# EAGLE board avoccado-avr-gin-panel (EAGLE 7.2.0)
Avoccado PCB AVR
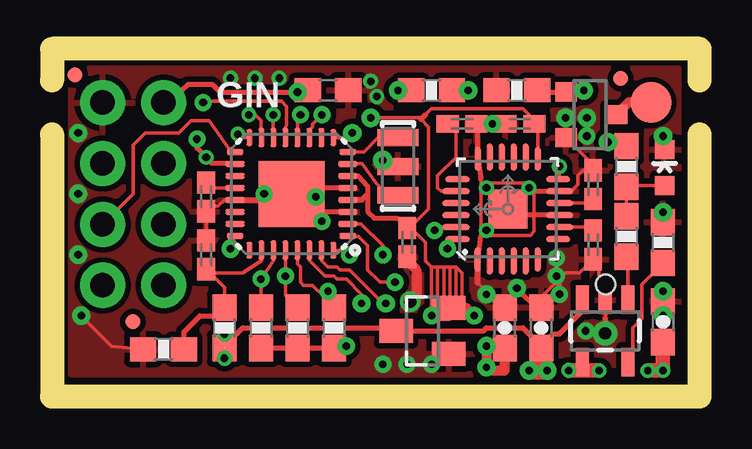
[diagram p0: board, top side]
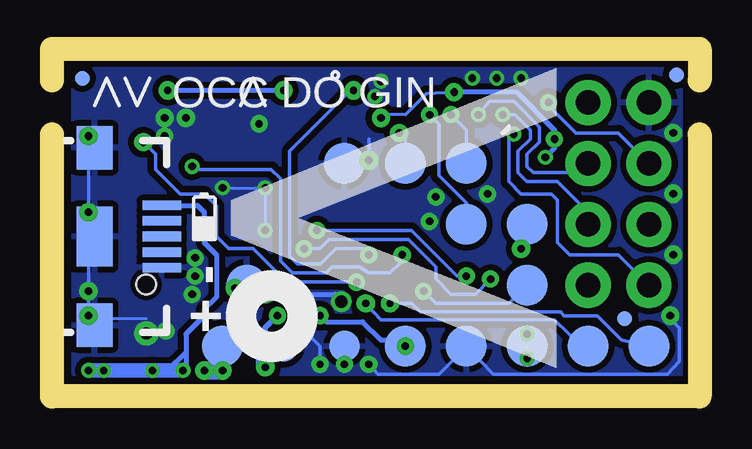
[diagram p1: board, bottom side, seen from below]

No outline drawn. Coordinates in mm, seen from the top.
Copper layers (1*16): Top 0.035mm / dielectric 1.5mm / Bottom 0.035mm
Design rules "SeeedStudio_2layer_DRU_no_angle_20140221 *": minimum track width 6mil, minimum drill 12mil, track to track 6mil, track to pad 6mil, pad to pad 6mil, via to via 6mil, smd to smd 0mil, copper to edge 10mil, drill to drill 10mil, minimum pad ring 10mil, minimum via ring 6mil, stop-mask expansion 0mil, vias tented up to drill 100mil, thermal gap 10mil
Net classes: 1 vcc: width 0.152 mm; 3 usbvcc: width 0.152 mm, drill 0.61 mm, clearance 0.152 mm
tRestrict: area 7.5,5.9 to 11.5,10; area 16.6,5.4 to 20.4,9.2
Milling: 6 lines

## Footprints (pad centres in the part's own frame; a part is rotated, then mirrored left to right if it is on the bottom)
C0402K = smd 0.925 x 0.74: 1 -0.6,0; 2 0.6,0
0603-CAP = smd 1.1 x 1: 1 -0.85,0; 2 0.85,0
C0603 = smd 1.1 x 1: 1 -0.85,0; 2 0.85,0
LED-0603 = smd 0.8 x 0.8: A 0,-0.75; C 0,0.75
MICRO-FIDUCIAL = smd 0.635 x 0.635: 1 0,0
1X02_NO_SILK = drill 1.016 pad 1.88: 1 0,0; 2 2.54,0
USB-B-MICRO-SMD_V03 = smd 1.6 x 0.4: D+1 2.8,0; D-1 2.8,0.65; GND1 2.8,-1.3; ID1 2.8,-0.65; VBUS1 2.8,1.3 | smd 1.5 x 1.8: SHIELD1 0,3.7; SHIELD2 0,-3.7 | smd 1.5 x 2.5: SHIELD3 0,0 | hole 0.8: 2.15,-2
SOT23 = smd 1 x 1.4: 1 -0.95,-1.1; 2 0.95,-1.1; 3 0,1.1
RESONATOR-SMD = smd 0.7 x 1.7: 1 -1.2,0; 2 0,0; 3 1.2,0
SOT23-3 = smd 0.8 x 0.9: 1 -0.95,-1; 2 0.95,-1; 3 0,1.1
0603-RES = smd 1.1 x 1: 1 -0.85,0; 2 0.85,0
TP20R = smd 1.7 x 1.7: TP 0,0
PAD.03X.05 = smd 1.27 x 1.27: P$1 0,0
QFN-24-TESTING = smd 1.016 x 0.254: 1 -2.1,1.257; 6 -2.1,-1.25; 13 2.1,-1.25; 18 2.1,1.25 | smd 1.143 x 0.254: 2 -2.163,0.75; 3 -2.163,0.25; 4 -2.163,-0.25; 5 -2.163,-0.75; 14 2.163,-0.75; 15 2.163,-0.25; 16 2.163,0.25; 17 2.163,0.75 | smd 0.254 x 1.016: 7 -1.25,-2.1; 12 1.25,-2.1; 19 1.25,2.1; 24 -1.25,2.1 | smd 0.254 x 1.143: 8 -0.75,-2.163; 9 -0.25,-2.163; 10 0.25,-2.163; 11 0.75,-2.163; 20 0.75,2.163; 21 0.25,2.163; 22 -0.25,2.163; 23 -0.75,2.163 | smd 1.626 x 1.626: P$1 0,0
SOT23-5 = smd 0.55 x 1.2: 1 -0.95,-1.3; 2 0,-1.3; 3 0.95,-1.3; 4 0.95,1.3; 5 -0.95,1.3
MLF32-PAD = smd 0.7 x 0.25: 1 -2.35,1.75; 8 -2.35,-1.75; 17 2.35,-1.75; 24 2.35,1.75 | smd 0.8 x 0.25: 2 -2.35,1.25; 3 -2.35,0.75; 4 -2.35,0.25; 5 -2.35,-0.25; 6 -2.35,-0.75; 7 -2.35,-1.25; 18 2.35,-1.25; 19 2.35,-0.75; 20 2.35,-0.25; 21 2.35,0.25; 22 2.35,0.75; 23 2.35,1.25 | smd 0.25 x 0.7: 9 -1.75,-2.35; 16 1.75,-2.35; 25 1.75,2.35; 32 -1.75,2.35 | smd 0.25 x 0.8: 10 -1.25,-2.35; 11 -0.75,-2.35; 12 -0.25,-2.35; 13 0.25,-2.35; 14 0.75,-2.35; 15 1.25,-2.35; 26 1.25,2.35; 27 0.75,2.35; 28 0.25,2.35; 29 -0.25,2.35; 30 -0.75,2.35; 31 -1.25,2.35 | smd 2.75 x 2.75: PAD 0,0

## Placement (x,y rotation side)
C1  0.1uF  [C0402K]  5.94,7.85 90 top
C2  0.1uF  [C0402K]  19.02,10.9 0 top
C3  0.1uF  [C0402K]  14.33,5.95 90 top
C4  4.7uF  [0603-CAP]  24.99,2.64 90 top
C5  4.7uF  [0603-CAP]  19.91,2.39 90 top
C6  4.7uF  [0603-CAP]  18.39,2.39 90 top
C7  0.1uF  [C0402K]  5.94,5.44 90 top
C8  0.1uF  [C0402K]  22.07,8.36 90 top
C9  2.2nF  [C0402K]  16.61,10.9 0 top
C10  4.7uF  [C0603]  11.02,12.29 0 top
C11  0.1uF  [C0402K]  22.08,5.85 270 top
D1  LED  [LED-0603]  25.05,9.07 0 top
FID2  FIDUCIALUFIDUCIAL  [MICRO-FIDUCIAL]  0.48,12.93 0 top
FID4  FIDUCIALUFIDUCIAL  [MICRO-FIDUCIAL]  2.9,2.64 0 top
FID5  FIDUCIALUFIDUCIAL  [MICRO-FIDUCIAL]  23.22,12.8 0 top
FID6  FIDUCIALUFIDUCIAL  [MICRO-FIDUCIAL]  2.64,2.77 0 bottom
FID8  FIDUCIALUFIDUCIAL  [MICRO-FIDUCIAL]  0.48,12.93 0 bottom
FID9  FIDUCIALUFIDUCIAL  [MICRO-FIDUCIAL]  25.25,12.8 0 bottom
JP2  M021X02_NO_SILK  [1X02_NO_SILK]  1.63,11.79 0 top
JP22  USB_MICROB_PLUGCONN-11752  [USB-B-MICRO-SMD_V03]  24.74,6.2 0 bottom
JP27  M021X02_NO_SILK  [1X02_NO_SILK]  1.63,9.25 0 top
JP28  M021X02_NO_SILK  [1X02_NO_SILK]  1.63,6.71 0 top
JP29  M021X02_NO_SILK  [1X02_NO_SILK]  1.63,4.17 0 top
LDO  MCP1703CB  [SOT23]  14.96,2.26 90 top
Q1  16MHz  [RESONATOR-SMD]  13.94,9.12 270 top
Q2  N-FET  [SOT23-3]  21.95,11.28 270 top
R1  511R  [0603-RES]  15.34,12.29 0 top
R2  10K  [0603-RES]  11.28,2.39 270 top
R3  2K  [0603-RES]  24.99,5.94 270 top
R4  2K  [0603-RES]  23.47,6.2 270 top
R5  4.7M  [0603-RES]  18.9,12.29 0 top
R6  511R  [0603-RES]  23.47,9.12 270 top
R7  4.7M  [0603-RES]  4.17,1.5 0 top
R8  4.7M  [0603-RES]  6.71,2.39 270 top
R10  10K  [0603-RES]  9.75,2.39 270 top
R11  10K  [0603-RES]  8.23,2.39 270 top
TP1  TPTP20R  [TP20R]  24.49,11.79 0 top
TP2  TPTP20R  [TP20R]  1.63,1.63 0 bottom
TP3  TEST-POINT3X5  [PAD.03X.05]  14.33,1.63 180 bottom
TP4  TPTP20R  [TP20R]  19.41,1.63 0 bottom
TP5  TEST-POINT3X5  [PAD.03X.05]  16.87,1.63 0 bottom
TP6  TPTP20R  [TP20R]  4.17,1.63 0 bottom
TP7  TPTP20R  [TP20R]  6.71,4.17 0 bottom
TP8  TPTP20R  [TP20R]  6.71,6.71 0 bottom
TP9  TPTP20R  [TP20R]  11.79,1.63 0 bottom
TP10  TPTP20R  [TP20R]  6.71,1.63 0 bottom
TP11  TPTP20R  [TP20R]  9.25,9.25 0 bottom
TP12  TPTP20R  [TP20R]  9.25,1.63 0 bottom
TP14  TPTP20R  [TP20R]  9.25,6.71 0 bottom
TP15  TPTP20R  [TP20R]  11.79,9.25 0 bottom
TP16  TPTP20R  [TP20R]  14.33,9.25 0 bottom
TP17  TPTP20R  [TP20R]  18.39,4.17 0 bottom
U1  MPU-6000QFN-24  [QFN-24-TESTING]  18.52,7.34 90 top
U2  MCP73831  [SOT23-5]  22.58,2.26 180 top
U3  [MLF32-PAD]  9.5,7.98 180 top

## Library data of the parts
C1-C3 = resistor
C4-C6 = SparkFun-Capacitors; PROD_ID: CAP-08280
C7-C11 = rcl
D1 Q1 U2 = SparkFun
FID2 FID4-FID6 FID8 FID9 = SparkFun-Aesthetics
JP2 JP27-JP29 = SparkFun-Connectors
JP22 = SparkFun-Connectors; PROD_ID: CONN-11752
LDO = linear
Q2 = SparkFun-DiscreteSemi; PROD_ID: TRANS-08345
R1-R8 R10 R11 = SparkFun-Resistors
TP1 TP2 TP4 TP6-TP12 TP14-TP17 = testpad
TP3 TP5 = SparkFun-Passives
U1 = SparkFun-Sensors
U3 = SparkFun-DigitalIC

## Nets
3.3V: C2.2 C3.2 C6.1 C10.1 JP2.2 LDO.2 R2.2 R10.2 R11.2 TP5.P$1 TP9.TP U1.13 U3.4 U3.6 U3.18
5V: C4.1 JP22.VBUS1 U2.4
A0: U3.23
A1: TP8.TP U3.24
A2: U3.25
A3: C7.1 R7.2 R8.1 U3.26
A4: R11.1 U1.24 U3.27
A5: R10.1 U1.23 U3.28
A6: U3.19
A7-NRF-IRQ: U3.22
AREF: C1.2 U3.20
CHG-PROG: R3.2 U2.5
D2-INT: U1.12 U3.32
D3: R6.1 U3.1
D4: R1.1 U3.2
D5: TP15.TP U3.9
D6: U3.10
D7: TP14.TP U3.11
D8: TP11.TP U3.12
D9: JP27.1 U3.13
D10: JP27.2 U3.14
GND [vcc]: C1.1 C2.1 C3.1 C4.2 C5.2 C6.2 C7.2 C8.2 C9.2 C10.2 C11.2 D1.C JP2.1 JP22.GND1 JP22.SHIELD1 JP22.SHIELD2 JP22.SHIELD3 LDO.1 Q1.2 Q2.2 R3.1 R5.1 R7.1 TP3.P$1 TP12.TP TP16.TP TP17.TP U1.1 U1.9 U1.11 U1.18 U2.2 U3.3 U3.5 U3.21 U3.PAD
LED: D1.A R4.1 R6.2
MISO: JP29.1 U3.16
MOSI: JP28.2 U3.15
N$1: Q1.1 U3.8
N$2: Q1.3 U3.7
N$6: Q2.1 R1.2 R5.2
N$7: C8.1 U1.10
N$8: C9.1 U1.20
N$10: C11.1 U1.8
RESET: R2.1 TP7.TP U3.29
RXI: TP2.TP U3.30
SCK: JP28.1 U3.17
SOC: R4.2 U2.1
TXO: TP6.TP U3.31
VBAT [vcc]: C5.1 LDO.3 R8.2 TP4.TP TP10.TP U2.3
VIBR: Q2.3 TP1.TP

## Tracks (layer width: path | path; a pad name or v marks a point on that pad's centre or on a via)
3.3V  (via drill 0.3 pad 0.71, 0.3 pad 0.76, 0.32, 0.32 pad 0.71, 0.32 pad 0.76)
  Top 0.127: 19.77,10.53 C2.2 19.62,11.06 | 12.68,8.1 12.68,7.98 | C6.1 | U3.18 7.13,9.25
  Top 0.152: U3.6 11.86,8.74 | 19.77,10.53 U1.13 | 4.67,12.29 JP2.2 | 19.62,11.06 19.15,11.53 15.34,11.53 15.09,11.28 | 15.34,4.93 15.09,5.18 15.09,5.94 14.48,6.55 C3.2 14.43,6.55 15.21,7.34 15.21,10.77 14.9,11.09 14.83,11.15 v12.8,11.15 | 15.34,4.93 15.6,4.93 | 15.6,4.93 15.85,4.93 | 15.85,4.93 16.1,4.93 | 16.1,4.93 16.36,4.93 | 16.36,4.93 16.61,4.67 16.61,3.4 v17.12,2.9 | 16.36,4.93 16.36,3.15 | 16.1,4.93 16.1,3.4 | 15.85,4.93 15.85,3.4 | 15.6,4.93 15.6,3.15 | 15.34,4.93 v15.34,2.9 | v9.75,12.22 10.05,12.17 C10.1 10.26,12.29
  Top 0.203: R11.2 R10.2 R2.2 11.37,1.63 TP9.TP | 12.68,7.98 12.68,7.24 12.96,6.96 13.92,6.96 C3.2 | 7.13,9.25 6.2,9.25 v5.94,9.5 5.56,9.88 v5.56,10.26 | 4.67,12.29 4.93,12.29 5.18,12.55 6.2,12.55 6.53,12.22 v9.75,12.22 9.88,12.17 | 12.43,7.73 12.68,7.98 | U3.6 12.28,8.73 12.68,8.28 12.68,7.98 | 15.09,11.28 14.9,11.09
  Top 0.254: 12.43,7.73 U3.4
  Top 0.406: C6.1 18.3,1.63 v17.63,1.63 v17.63,0.74 17.75,0.61 18.39,0.61 18.39,1.63 | v17.12,2.9 16.8,3.21 LDO.2 | v15.34,2.9 16.1,2.9
  Bottom 0.127: 11.79,11.28 12.68,11.28
  Bottom 0.152: 9.55,12.22 v9.75,12.22 10.9,12.17 11.79,11.28 | 12.68,11.28 v12.8,11.15
  Bottom 0.203: v5.94,9.5 5.56,9.88 v5.56,10.26 5.56,10.64 7.14,12.22 9.55,12.22 | v15.34,2.9 15.09,2.64 13.56,2.64 12.8,1.88 12.04,1.88 TP9.TP
  Bottom 0.254: v17.63,1.63 17.63,2.39 v17.12,2.9
  Bottom 0.762: v17.63,0.74 v17.63,1.63 TP5.P$1
  other vias: 11.79,1.63
5V  (via drill 0.3, 0.32)
  Top 0.127: v21.06,0.61 21.28,0.61 U2.4
  Top 0.61: C4.1 v24.99,0.61 v24.36,0.61 | v21.06,0.61 v22.33,0.61
  Bottom 0.203: JP22.VBUS1 20.45,7.5 20.17,7.21 20.17,5.94 19.66,5.44 19.66,3.66 20.17,3.15 20.17,2.9 20.93,2.13 20.93,1.37 | 20.93,1.37 20.93,0.74 v21.06,0.61 | 20.93,1.37 21.69,0.61
  Bottom 0.61: v24.99,0.61 v24.36,0.61 21.69,0.61 v21.06,0.61
A1  (via drill 0.32 pad 0.76)
  Top 0.127: U3.24 7.09,6.16 v6.96,5.69
  Bottom 0.152: TP8.TP 6.96,6.45 v6.96,5.69
A3
  Top 0.127: 8.25,5.2 8.23,5.18 | 5.78,4.67 C7.1 | R7.2 5.02,1.8
  Top 0.152: U3.26 8.25,5.2 | 8.23,5.18 7.47,4.67 5.78,4.67 | R8.1 6.71,4.07 C7.1
  Top 0.203: 5.02,1.8 5.02,2.22 5.69,2.9 6.36,2.9 R8.1
A4  (via drill 0.32 pad 0.71)
  Top 0.127: 16.25,6.09 U1.24
  Top 0.152: v16,5.69 16.25,6.09 | U3.27 8.75,5.19 v8.23,4.42 R11.1
  Bottom 0.152: v16,5.69 15.34,5.69 14.96,6.07 11.66,6.07 10.52,4.93 10.52,4.42 9.88,3.79 8.87,3.79 v8.23,4.42
A5  (via drill 0.32 pad 0.71)
  Top 0.152: U3.28 v9.25,4.55 9.25,3.75 R10.1 | v15.47,6.45 15.73,6.59 U1.23
  Bottom 0.152: v15.47,6.45 11.53,6.45 9.63,4.55 v9.25,4.55
AREF
  Top 0.152: C1.2 6.17,8.23 U3.20
CHG-PROG
  Top 0.152: R3.2 24.11,4.21 24.11,2.77 23.72,2.39 23.72,1.15 U2.5
D2-INT  (via drill 0.32, 0.32 pad 0.71)
  Top 0.127: U1.12 20.68,8.65
  Top 0.152: 20.68,8.65 v20.68,9.12 | v11.91,5.44 11.72,5.63 U3.32
  Bottom 0.152: v11.91,5.44 11.91,5.18 12.42,4.67 13.31,4.67 13.69,4.93 14.83,4.93 15.09,4.67 16.48,4.67 16.99,5.18 16.99,8.61 17.37,8.99 20.55,8.99 v20.68,9.12
D3  (via drill 0.32 pad 0.71, 0.32 pad 0.76)
  Top 0.152: R6.1 23.3,10.13 v22.71,10.13 | U3.1 11.88,6.2 12.29,6.2 12.68,5.82 12.68,4.8 13.18,4.29 v13.82,4.29
  Bottom 0.152: v13.82,4.29 16.74,4.29 18.14,5.69 19.15,5.69 19.66,6.2 19.66,7.47 20.17,7.98 21.18,7.98 22.2,8.99 22.2,9.63 v22.71,10.13
D4  (via drill 0.3 pad 0.76, 0.32 pad 0.71)
  Top 0.152: U3.2 12.4,6.73 13.31,5.82 v13.31,5.44 | v13.95,12.29 R1.1
  Bottom 0.152: v13.31,5.44 13.56,5.69 14.68,5.69 15.32,5.05 16.28,5.05 16.61,5.38 16.61,9.75 14.07,12.29 v13.95,12.29
D5  (via drill 0.32 pad 0.76)
  Top 0.152: U3.9 11.85,10.33 v12.04,10.52
  Bottom 0.152: TP15.TP 11.79,10.26 v12.04,10.52
D7  (via drill 0.32 pad 0.71)
  Top 0.152: U3.11 10.26,10.34 10.26,10.64 10.39,10.77 10.39,10.9 v10.77,11.28
  Bottom 0.152: v10.77,11.28 10.39,10.9 10.39,8.74 9.25,7.59 TP14.TP
D8  (via drill 0.32 pad 0.71)
  Top 0.152: U3.12 9.75,11.02 v9.88,11.28
  Bottom 0.152: v9.88,11.28 9.25,10.64 TP11.TP
D9  (via drill 0.32 pad 0.71)
  Top 0.152: U3.13 9.25,10.77 9.3,10.82 9.3,11.61 9.09,11.84 5.84,11.84 v5.82,11.79
  Bottom 0.152: v5.82,11.79 5.69,11.53 4.67,10.52 2.9,10.52 JP27.1
D10  (via drill 0.32)
  Top 0.152: U3.14 8.74,10.34 v8.74,11.28
  Bottom 0.152: v8.74,11.28 8.28,11.84 7.26,11.84 6.2,10.77 6.2,10.13 6.71,9.63 6.71,9.12 6.45,8.87 4.55,8.87 JP27.2
GND  (via drill 0.3 pad 0.71, 0.3 pad 0.76, 0.32, 0.32 pad 0.71, 0.32 pad 0.76, 0.32 pad 0.81, 0.51 pad 0.86, 0.51 pad 1.02)
  Top 0.127: R3.1 v24.99,7.21 | 24.99,9.88 D1.C | C4.2 v24.99,3.91 v24.99,2.9 | 22.33,5 C11.2 | U2.2 22.58,2.77 | C5.2 19.49,3.24 | 17.26,4.28 17.63,3.91 17.97,3.66 C6.2 | U1.11 21.17,8.09 | C2.1 v17.88,10.9
  Top 0.152: U3.21 6.71,7.73 6.45,7.47 6.16,7.47 C1.1 C7.2 | 11.86,7.21 U3.3 | Q1.2 13.82,9.25 v13.31,9.37 | v24.99,10.39 24.99,9.88 | U2.2 22.58,4.29 22.33,4.55 22.33,5 | 19.49,3.24 20.68,4.42 20.93,4.67 21.5,4.67 C11.2 | Q2.2 22.07,9.2 C8.2 21.66,8.96 21.44,8.74 21.44,8.36 21.17,8.09 | v0.74,2.9 2.01,1.63 R7.1 | 10.77,8.23 v10.52,7.85 | 10.25,7.23 10.25,7.71 v10.52,7.85 | v8.36,7.98 U3.PAD v10.52,7.85 | 17.39,8.59 17.39,6.27 17.37,6.25 19.46,6.25 19.61,6.4 19.61,6.96 | 19.61,6.96 19.61,8.33 19.51,8.43 17.42,8.43 | 19.28,7.09 19.48,7.09 19.61,6.96
  Top 0.203: 20.63,8.1 U1.11 19.41,8.09 | U1.9 20.61,7.09 19.28,7.09 | 17.39,8.59 U1.18 17.27,10.84 C9.2 | 17.39,6.21 U1.1 | U3.3 10.25,7.23 | 19.91,3.15 19.79,3.15 v18.9,4.04 18.61,3.24 C6.2 17.84,3.79 v17.63,3.79 | v20.55,5.31 v20.55,4.55 20.68,4.42 v20.68,3.79 | v21.77,2.26 22.33,2.26 v22.58,2.16 22.58,2.77 | U3.5 10.77,8.23
  Top 0.254: U1.1 17.26,4.28 | U3.21 8.11,7.73 v8.36,7.98 | U3.PAD 9.98,7.98 10.25,7.71
  Top 0.406: C3.1 14.33,5.18 14.71,4.8 14.71,3.79 v14.45,3.48
  Bottom 0.127: 22.58,2.77 24.87,2.77 v24.99,2.9 | v17.63,6.45 v17.63,8.23 17.65,8.21 19.38,8.21 v19.41,8.23
  Bottom 0.152: v24.99,10.39 v24.99,7.21 v24.99,3.91 v24.99,2.9 | v15.34,0.86 15.34,1.63 16.23,2.52 16.23,3.79 | v13.31,0.86 12.93,0.46 10.39,0.46 TP12.TP 8.1,0.46 0.86,0.46 0.36,0.99 0.36,2.39 0.74,2.77 v0.74,2.9 | TP16.TP 14.2,9.37 v13.31,9.37 13.31,10.26
  Bottom 0.203: v17.63,3.79 16.23,3.79 14.71,3.79 v14.45,3.48
  Bottom 0.762: v17.63,3.79 18.01,4.17 TP17.TP
  other vias: 14.33,0.86 12.8,12.67 13.06,12.04 21.82,10.39 20.93,11.15 21.82,11.15 8.99,12.8 7.98,12.8 6.96,12.8 0.61,5.44 0.61,7.98 0.61,10.52 10.77,6.83
  pour Bottom (isolate 0.254): 0.29,13.2 25.66,13.2 25.64,0.45 0.29,0.45
  pour Top (isolate 0.229): 0.29,13.2 0.29,0.45 25.64,0.45 25.64,13.21
LED
  Top 0.127: R6.2 23.52,8.32
  Top 0.152: R6.2 R4.1 | 23.52,8.32 D1.A
MISO  (via drill 0.32)
  Top 0.152: U3.16 7.4,10.33 v7.26,10.46
  Bottom 0.152: JP29.1 2.9,5.44 4.93,5.44 5.44,5.94 5.44,7.72 5.69,7.98 6.96,7.98 7.47,8.48 7.47,10.26 v7.26,10.46
MOSI  (via drill 0.32 pad 0.61)
  Top 0.152: U3.15 8.23,10.35 8.23,11.02 7.98,11.28 v7.72,11.28
  Bottom 0.152: v7.72,11.28 7.21,11.28 6.58,10.64 6.58,10.26 7.09,9.75 7.09,8.87 6.71,8.48 5.44,8.48 4.17,7.21 JP28.2
N$1
  Top 0.152: U3.8 12.52,9.73 13.11,10.32 Q1.1
N$2
  Top 0.152: U3.7 11.87,9.25 12.45,9.25 13.06,8.41 13.49,7.92 Q1.3
N$6  (via drill 0.3 pad 0.76)
  Top 0.127: 19.81,12.23 R5.2 | R1.2 16.61,12.29
  Top 0.203: 19.81,12.23 Q2.1 21.63,12.23 v21.69,12.29 | v16.87,12.29 R1.2
  Bottom 0.203: v21.69,12.29 v16.87,12.29
N$7
  Top 0.152: C8.1 21.91,7.59 U1.10
  Top 0.203: U1.10 20.62,7.59
N$8
  Top 0.152: U1.20 15.73,8.09 15.6,8.23 15.6,8.74 16.36,9.5 16.36,10.55 C9.1
N$10
  Top 0.152: C11.1 21.93,6.59 U1.8
RESET  (via drill 0.3 pad 0.71)
  Top 0.127: 10.9,3.66 R2.1 11.02,3.49 v11.02,3.91 | U3.29
  Top 0.152: 10.9,3.66 10.39,4.17 10.01,4.17 9.88,4.29 9.88,4.93 9.75,5.05 U3.29
  Bottom 0.152: v11.02,3.91 10.52,3.4 7.47,3.4 TP7.TP
RXI  (via drill 0.3 pad 0.76)
  Top 0.152: U3.30 10.25,5.19 10.9,4.55 11.28,4.55 11.4,4.42 11.79,4.42 12.42,3.79 v12.42,3.4
  Bottom 0.152: v12.42,3.4 11.53,3.4 11.15,3.05 5.31,3.05 5.18,2.9 3.79,2.9 2.77,1.88 TP2.TP
SCK
  Top 0.127: U3.17 7.12,9.75 6.96,9.75
  Top 0.152: 6.96,9.75 6.07,11.02 5.31,11.02 4.8,10.52 3.4,10.52 2.9,10.01 2.9,7.98 JP28.1
SOC
  Top 0.127: R4.2 23.53,5.29
  Top 0.152: 23.53,5.29 U2.1
TXO  (via drill 0.3 pad 0.76)
  Top 0.152: v13.44,3.4 13.31,3.4 11.91,4.8 11.53,4.8 11.4,4.93 11.02,4.93 10.75,5.2 U3.31
  Bottom 0.152: TP6.TP 4.42,1.63 5.56,2.72 12.8,2.72 v13.44,3.4
VBAT  (via drill 0.32, 0.32 pad 0.76)  (1 unrouted)
  Top 0.127: R8.2 6.96,1.88 | 13.31,2.13 13.56,2.39 | U2.3 21.85,3.56
  Top 0.152: 13.56,2.39 13.73,2.39 LDO.3
  Top 0.203: 13.56,2.39 7.47,2.39 6.96,1.88 v6.71,2.13 v6.71,1.12 | LDO.3 17.5,2.26 17.63,2.39 19.15,2.39 19.91,1.63 | 19.91,1.63 C5.1 | 19.91,1.63 20.42,2.13 20.68,2.13 21.63,3.09 U2.3
  Top 0.762: v19.41,0.61 v20.17,0.61 19.91,0.86 C5.1
  Bottom 0.152: TP4.TP 19.41,1.37 v20.17,0.61
  Bottom 0.762: v20.17,0.61 v19.41,0.61
VIBR
  Top 0.406: TP1.TP 23.55,11.79 Q2.3

## Text on the board
tPlace: GIN
bPlace: OCC DO GIN | + | -